# Altium PCB fuenteRegulada.PcbDoc
Units mm, origin at the board's own origin, x right, y up, seen from the top; angles counter-clockwise.
Board outline 50 x 50 mm, 2 copper layers (Top Layer, Bottom Layer); 19 components, 16 nets, 59 pads, 0 vias.
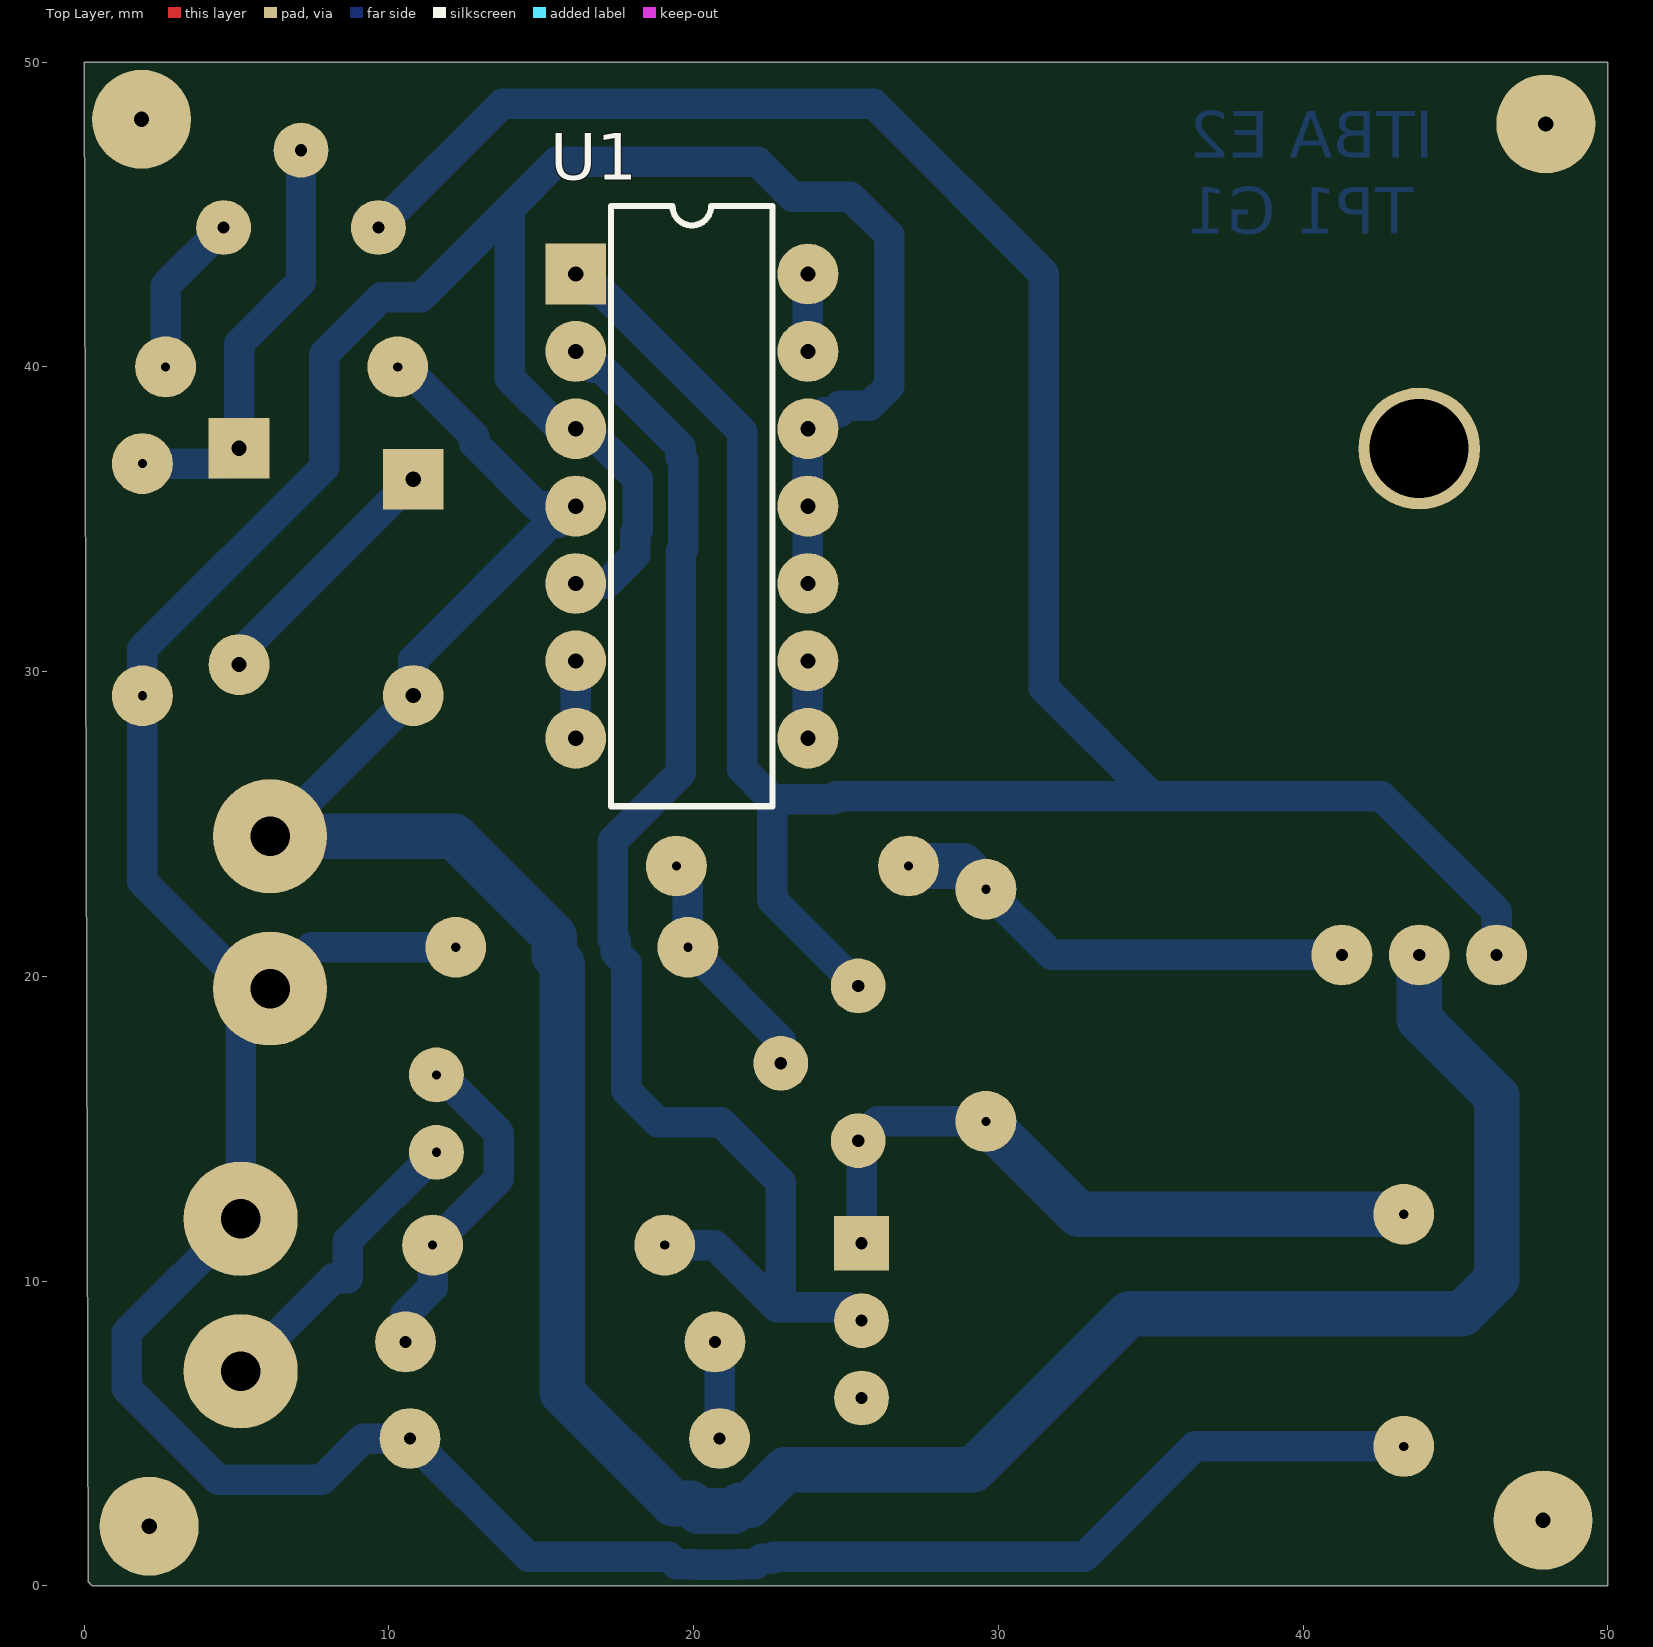
[diagram p0: Top Layer view]
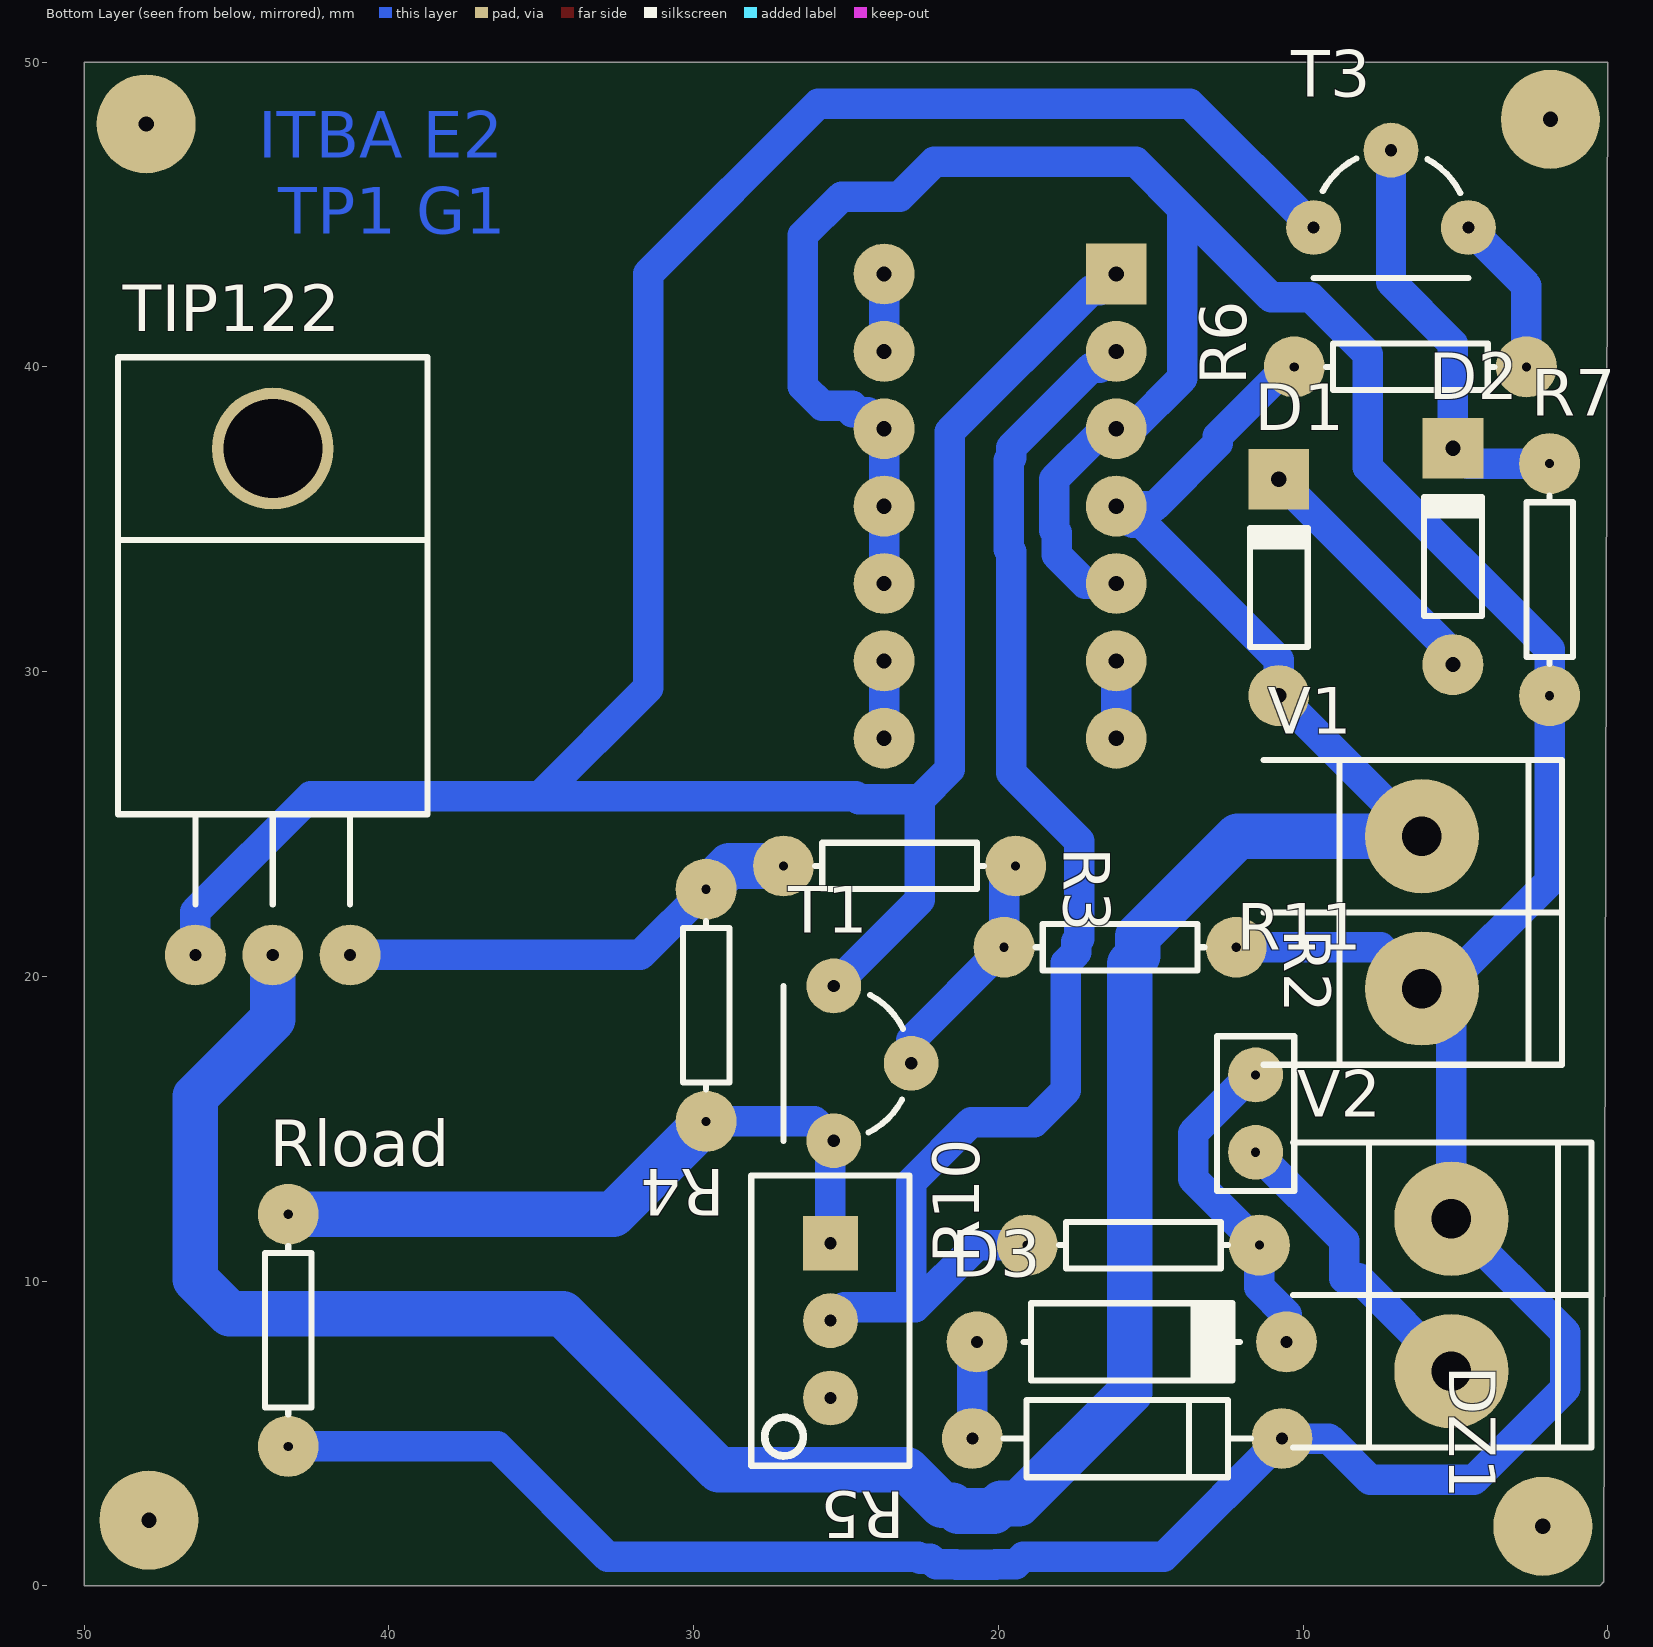
[diagram p1: Bottom Layer view, seen from below]

## Layer stack, top to bottom
Top Solder: solder mask 0.0102, Solder Resist, Dk 3.5
Top Layer: signal copper 0.0356
Dielectric 1: dielectric 0.32, FR-4, Dk 4.8
Bottom Layer: signal copper 0.0356
Bottom Solder: solder mask 0.0102, Solder Resist, Dk 3.5

## Board outline
0.127,0.127 0.254,0 50,0 50,50 0,50

## Design rules (kind name [scope] priority, off if disabled: settings)
Clearance [All] p1: gap=0.5 ignorepadtopadclearanceinfootprint=FALSE
PolygonConnect [All] p1: connectstyle=Relief reliefconductorwidth=0.254 reliefentries=4 polygonreliefangle="90 Angle" airgapwidth=0.254
RoutingVias [All] p1: holewidth=0.4 width=2 viastyle="Through Hole" minholewidth=0.3 minwidth=1.9 maxholewidth=0.5 maxwidth=2.1
SolderMaskExpansion [All] p1: expansion=0.102
Width [All] p1: maxlimit=1.5 minlimit=0.8 preferedwidth=1
30 further rules are at their usual default settings.

## Classes and differential pairs
component class fuenteRegulada: D1 D2 D3 DZ1 R2 R3 R4 R5 R6 R7 R10 R11 Rload T1 T3 TIP122 V1 V2

## Components (designator, comment, footprint, x,y, rotation, side; value= is the part's Value field where it differs from the comment)
D1 "Diode 1N914" DO-35 10.795,32.766 r90 bottom
D2 "Diode 1N914" DO-35 5.08,33.782 r90 bottom
D3 "DIODO" DO41 15.621,8.001 r180 bottom
DZ1 "D Zener" DIODE-0.4 15.77,4.83 r180 bottom
R2 "Res1" AXIAL-0.3 16.002,20.955 r180 bottom value=8.2K
R3 "Res1" AXIAL-0.3 23.241,23.622 r180 bottom value=620
R4 "Res1" AXIAL-0.3 29.591,19.05 r270 bottom value=1
R5 "PRESET" "PRESET V" 25.51,8.7 r270 bottom
R6 "Res1" AXIAL-0.3 6.477,40.005 r0 bottom value=820
R7 "Res1" AXIAL-0.3 1.905,33.02 r90 bottom value=100k
R10 "Res1" AXIAL-0.3 15.24,11.176 r0 bottom value=470
R11 "Res1" RES100 11.557,15.494 r90 bottom value=100
Rload "Res1" AXIAL-0.3 43.307,8.382 r90 bottom value=1K
T1 "TRANSISTOR NPN" TO92 24.13,17.145 r90 bottom
T3 "TRANSISTOR PNP" TO92 7.112,45.847 r0 bottom
TIP122 "TRANSISTOR NPN" "TO-220 H" 43.815,28.321 r180 bottom
U1 "LM324N" N014 19.939,35.433 r270 top
V1 "BORNERA 2" BORNERA2 6.096,22.098 r0 bottom
V2 "BORNERA 2" BORNERA2 5.13,9.54 r0 bottom

## Footprints (in the part's own frame and the unit in brackets; to place one, negate y for a bottom-side part, rotate by r counter-clockwise, add the part's x,y. Pads: shape width x height; smd on the part's side, far side on the other; paste and mask are expansions set on the pad)
AXIAL-0.3 [mm] "Axial Device, Thru-Hole; 2 Leads; 0.3 in Pin Spacing"
  round 2 hole 0.3: 1(-3.81,0) 2(3.81,0)
  silkscreen extent -2.77,-0.76 2.77,0.76
BORNERA2 [mm] "Bornera con Tornillos 5mm separación"
  round 3.75 hole 1.3: 1(0,2.5) 2(0,-2.5)
  silkscreen extent -4.6,-5 5.2,5, body extent -3.76,-4.89 3.94,5.61, height 10
DIODE-0.4 [mm] "Diode, Thru-Hole; 2 Leads; 0.4 in Pin Spacing"
  round 2 hole 0.4: 1(-5.08,0) 2(5.08,0)
  silkscreen extent -4.06,-1.27 4.06,1.27
DO41 [mm]
  round 2 hole 0.4: 1(-5.08,0) 2(5.08,0)
  silkscreen extent -3.56,-1.27 3.56,1.27, body extent -5.46,-1.19 5.46,1.37, height 2.03
DO-35 [mm] "Diode, Axial; Body 3.8 x 1.9 mm (LxDia. max), Lead Dia. 0.53 mm (max)"
  round 2 hole 0.5: 1(-3.55,0)
  rect 2x2 hole 0.5: 2(3.55,0)
  silkscreen extent -1.95,-0.95 2.05,0.95
N014 [mm] "DIP; 14 Leads; Row Spacing 7.62 mm; Pitch 2.54 mm"
  rect 2x2 hole 0.5: 1(-7.62,-3.81)
  round 2 hole 0.5: 2(-5.08,-3.81) 3(-2.54,-3.81) 4(0,-3.81) 5(2.54,-3.81) 6(5.08,-3.81) 7(7.62,-3.81) 8(7.62,3.81) 9(5.08,3.81) 10(2.54,3.81) 11(0,3.81) 12(-2.54,3.81) 13(-5.08,3.81) 14(-7.62,3.81)
  silkscreen extent -9.85,-2.65 9.85,2.65
"PRESET V" [mm]
  rect 1.8x1.8 hole 0.4: 1(-2.54,0)
  round 1.8 hole 0.4: 2(0,0) 3(2.54,0)
  silkscreen extent -4.76,-2.6 4.76,2.6, body extent -4.7,-2.42 4.83,2.42, height 11.55
RES100 [mm]
  round 1.8 hole 0.3: 1(-1.27,0) 2(1.27,0)
  silkscreen extent -2.54,-1.27 2.54,1.27, body extent -1.5,-0.91 2.21,0.93, height 1.58
TO92 [mm]
  round 1.8 hole 0.4: 1(0,-1.27) 2(2.54,1.27) 3(-2.54,1.27)
  silkscreen extent -2.54,-1 2.54,2.92, body extent -2.79,-1.55 2.79,2.79, height 8
"TO-220 H" [mm]
  round 2 hole 0.4: 1(-2.54,-7.62) 2(0,-7.62) 3(2.54,-7.62)
  round 4 hole 3.25: 4(0,9)
  silkscreen extent -5.08,-5.97 5.08,12, body extent -5.08,-7.81 5.08,11.47, height 4.45

## Part data
D1 D2: "High Conductance Fast Diode", Code_JEDEC=DO-204-AH, ComponentLink1Description="Manufacturer Link", ComponentLink1URL=http://www.fairchildsemi.com/, ComponentLink2Description=Datasheet, ComponentLink2URL=http://www.fairchildsemi.com/ds/1N%2F1N4448.pdf, DatasheetVersion=1997, LatestRevisionDate=17-Jul-2002, LatestRevisionNote="Re-released for DXP Platform.", PackageDescription="Diode, Axial; Body 3.8 x 1.9 mm (LxDia. max), Lead Dia. 0.53 mm (max)", PackageReference=DO-35, Published=8-Jun-2000, Publisher="Altium Limited"
DZ1: "Zener Diode", LatestRevisionDate=17-Jul-2002, LatestRevisionNote="Re-released for DXP Platform.", PackageDescription="Diode, Thru-Hole; 2 Leads; 0.7 in Pin Spacing", PackageReference=DIODE-0.7, Published=8-Jun-2000, Publisher="Altium Limited"
R2 R3 R4 R6 R7 R10 R11 Rload: "Resistor", LatestRevisionDate=17-Jul-2002, LatestRevisionNote="Re-released for DXP Platform.", PackageDescription="Axial Device, Thru-Hole; 2 Leads; 0.3 in Pin Spacing", PackageReference=AXIAL-0.3, Published=8-Jun-2000, Publisher="Altium Limited"
U1: "Quadruple Operational Amplifier", ComponentLink1Description="Manufacturer Link", ComponentLink1URL=http://www.ti.com/, ComponentLink2Description=Datasheet, ComponentLink2URL=http://www-s.ti.com/sc/ds/lm324.pdf, DatasheetVersion=Feb-1997, LatestRevisionDate=04-Mar-2005, LatestRevisionNote="Stylized 3D Model Added.", PackageDescription="DIP; 14 Leads; Row Spacing 7.62 mm; Pitch 2.54 mm", PackageReference=N014, PackageVersion=Oct-1995, Published=16-Jan-2001, Publisher="Altium Limited"

## Free pads (board coordinates)
  round 3.25 hole 0.5: 2(1.88,48.13) 2(2.13,1.95) 2(47.88,2.15) 2(47.97,47.98)

## Nets (pads, with @x,y where several pads share a name; then routed paths per layer and width w, separated by ;. In a path a pad name is that pad's centre, name@x,y a point inside that pad or via, vN(x,y) a via of type N, cw(c..) or ccw(c..) an arc to the next point about the centre after c; other vN are vias at no path point)
critic: T1.2 T3.2 TIP122.1 U1.1 | length 98.6
  Bottom Layer w1: T3.2 13.716,48.641 25.908,48.641 31.496,43.053 31.496,29.464 35.052,25.908 ; U1.1 16.669,42.513 16.957,42.513 21.59,37.88 21.59,26.797 22.574,25.813 ; T1.2 22.574,22.511 22.574,25.813 ; TIP122.1 46.355,22.125 42.572,25.908 35.052,25.908 ; 22.574,25.813 24.577,25.813 24.672,25.908 35.052,25.908
GND: DZ1.2 R2.2 R7.1 Rload.1 U1.3 U1.5 U1.10 U1.11 U1.12 V1.1 V2.2 | length 145.8
  Bottom Layer w1: R2.2 7.453,20.955 V1.1 ; U1.5 17.145,32.893 18.082,33.83 18.082,34.558 18.161,34.637 18.161,36.322 16.51,37.973 U1.3 15.621,37.973 13.97,39.624 13.97,45.212 ; U1.10 U1.11 U1.12 24.289,38.513 24.799,38.513 24.799,38.735 25.781,38.735 26.416,39.37 26.416,44.323 25.146,45.593 23.241,45.593 22.098,46.736 15.494,46.736 13.97,45.212 ; Rload.1 36.449,4.572 32.826,0.949 22.626,0.949 22.567,0.89 22.235,0.89 22.044,0.699 21.389,0.699 21.38,0.69 20.089,0.69 20.08,0.699 19.425,0.699 19.175,0.949 14.571,0.949 DZ1.2 9.148,4.83 7.788,3.47 4.4,3.47 1.397,6.473 1.397,8.307 V2.2 5.13,18.632 V1.1 ; V1.1 5.421,19.598 1.905,23.114 R7.1 1.905,30.743 7.874,36.712 7.874,40.42 9.745,42.291 11.049,42.291 13.97,45.212
NetD1_2: D1.2 D2.1 | length 8.5
  Bottom Layer w1: D2.1 5.08,30.601 D1.2
NetD2_2: D2.2 R7.2 T3.1 | length 14
  Bottom Layer w1: R7.2 4.578,36.83 D2.2 5.08,40.767 7.112,42.799 T3.1
NetD3_1: D3.1 DZ1.1 | length 3.2
  Bottom Layer w1: D3.1 20.85,7.852 DZ1.1
NetD3_2: D3.2 R10.1 R11.2 | length 11
  Bottom Layer w1: D3.2 10.541,8.901 11.43,9.79 R10.1 13.61,13.356 13.61,14.858 11.704,16.764 R11.2
NetR2_1: R2.1 R3.2 T1.1 | length 7.9
  Bottom Layer w1: R3.2 19.812,23.241 R2.1 22.86,17.907 T1.1
NetR3_1: R3.1 R4.1 TIP122.3 | length 15.4
  Bottom Layer w1: R4.1 31.75,20.701 TIP122.3
  Bottom Layer w1.5: R3.1 28.829,23.622 R4.1
NetR4_2: R4.2 R5.1 Rload.2 T1.3 | length 22.8
  Bottom Layer w1: R5.1 25.51,14.495 T1.3 26.035,15.24 R4.2
  Bottom Layer w1.5: R4.2 32.639,12.192 Rload.2
NetR5_2: R5.2 R10.2 U1.2 | length 45
  Bottom Layer w1: U1.2 16.669,39.973 16.957,39.973 19.582,37.348 19.582,37.022 19.661,36.943 19.661,34.015 19.582,33.936 19.582,26.684 17.34,24.442 17.34,21.238 17.44,21.138 17.44,20.785 17.78,20.445 17.78,16.256 18.828,15.208 20.894,15.208 22.86,13.242 22.86,9.271 22.733,9.144 ; R10.2 20.701,11.176 22.733,9.144 ; R5.2 25.066,9.144 22.733,9.144
NetR6_1: R6.1 T3.3 | length 5.4
  Bottom Layer w1: R6.1 2.667,42.672 T3.3
NetR11_1: R11.1 V2.1 | length 10.2
  Bottom Layer w1: V2.1 8.177,10.087 8.65,10.087 8.65,11.317 R11.1 ; V2.1@5.588,7.025 V2.1@5.628,7.025
NetU1_6: U1.6 U1.7 | length 2.5
  Bottom Layer w1: U1.7 U1.6
NetU1_8: U1.8 U1.9 | length 2.5
  Bottom Layer w1: U1.8 U1.9
NetU1_13: U1.13 U1.14 | length 2.5
  Bottom Layer w1: U1.13 U1.14
V1: D1.1 R6.2 TIP122.2 U1.4 V1.2 | length 95.9
  Bottom Layer w1: V1.2 6.177,24.598 D1.1 10.795,30.387 15.301,34.893 15.589,34.893 U1.4 14.859,35.433 12.795,37.497 12.795,37.73 10.52,40.005 R6.2
  Bottom Layer w1.5: V1.2@6.177,24.598 12.142,24.598 15.423,21.317 15.423,20.68 15.69,20.413 15.69,6.34 19.331,2.699 19.9,2.699 20.15,2.449 21.319,2.449 21.51,2.64 21.842,2.64 23.002,3.8 29.17,3.8 34.3,8.93 45.23,8.93 46.355,10.055 46.355,16.055 43.815,18.595 TIP122.2
pads on no net: R5.3 TIP122.4

## Other copper
Bottom Layer:
  text "ITBA E2" at 44.29,46.86 h1.52
  text "TP1 G1" at 43.64,44.37 h1.52